# EAGLE board Rocket Panel v2.0 (EAGLE 5.06)
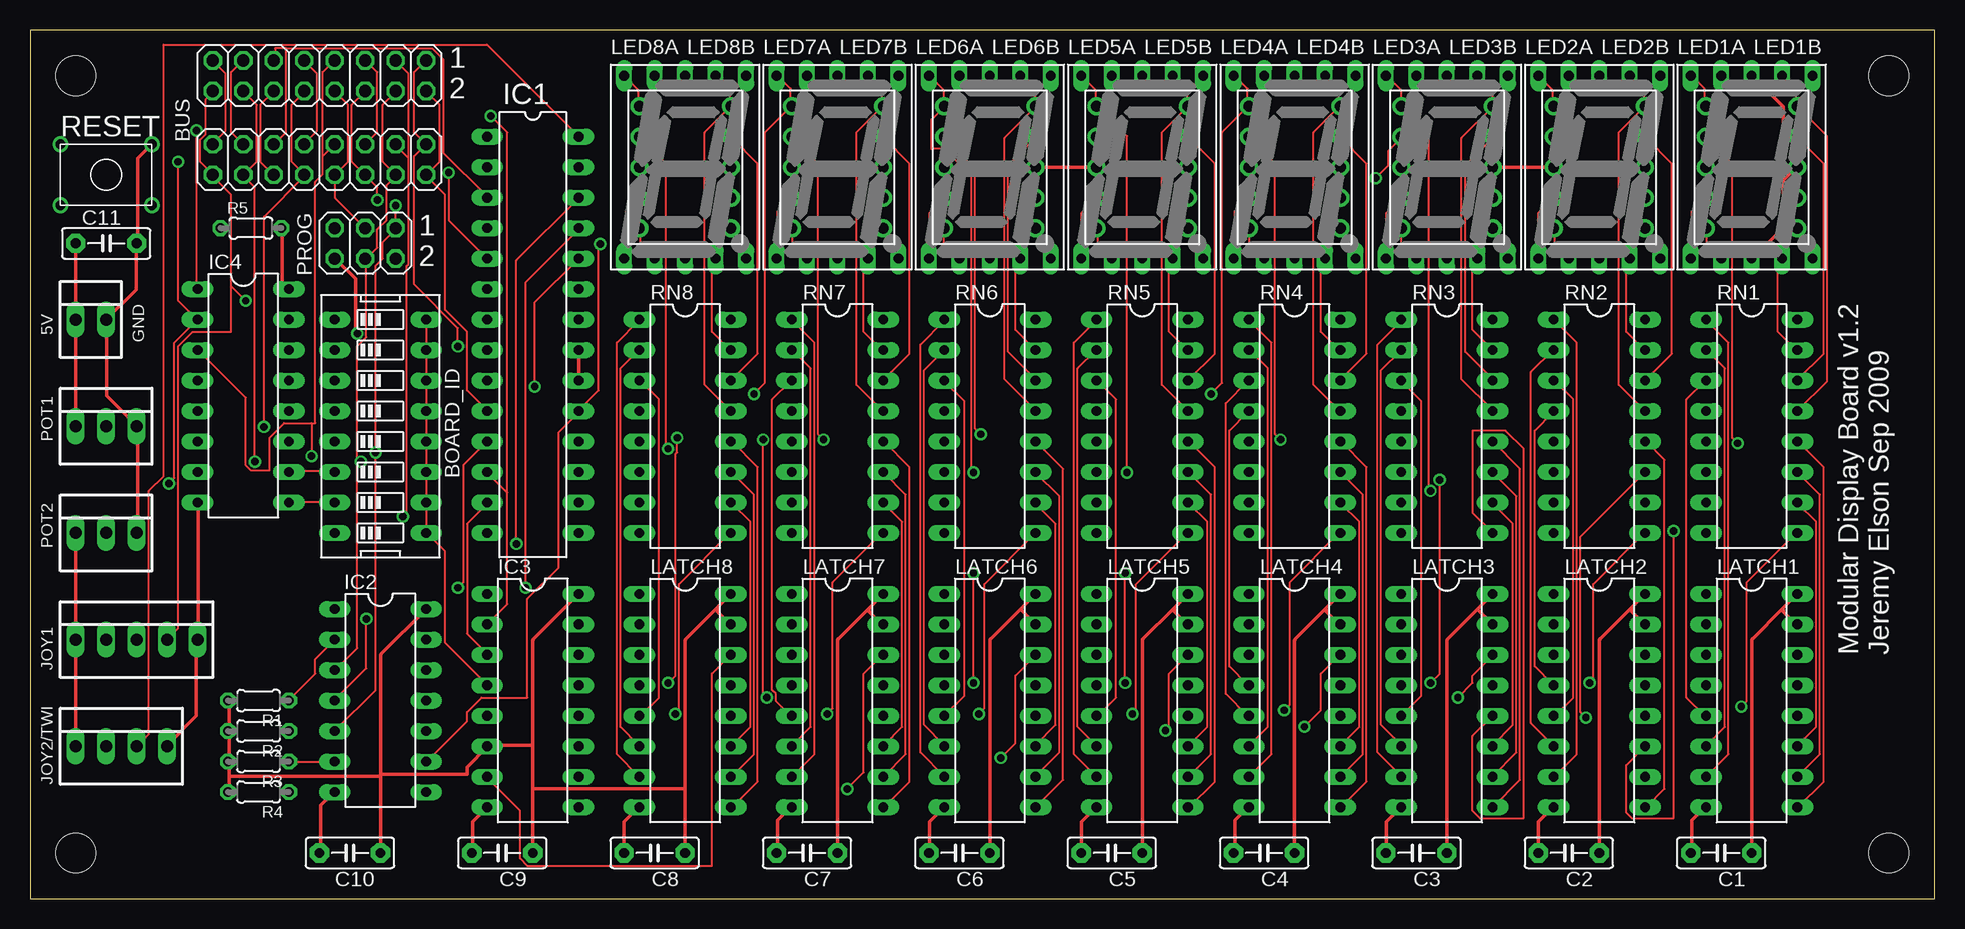
[diagram p0: board, top side]
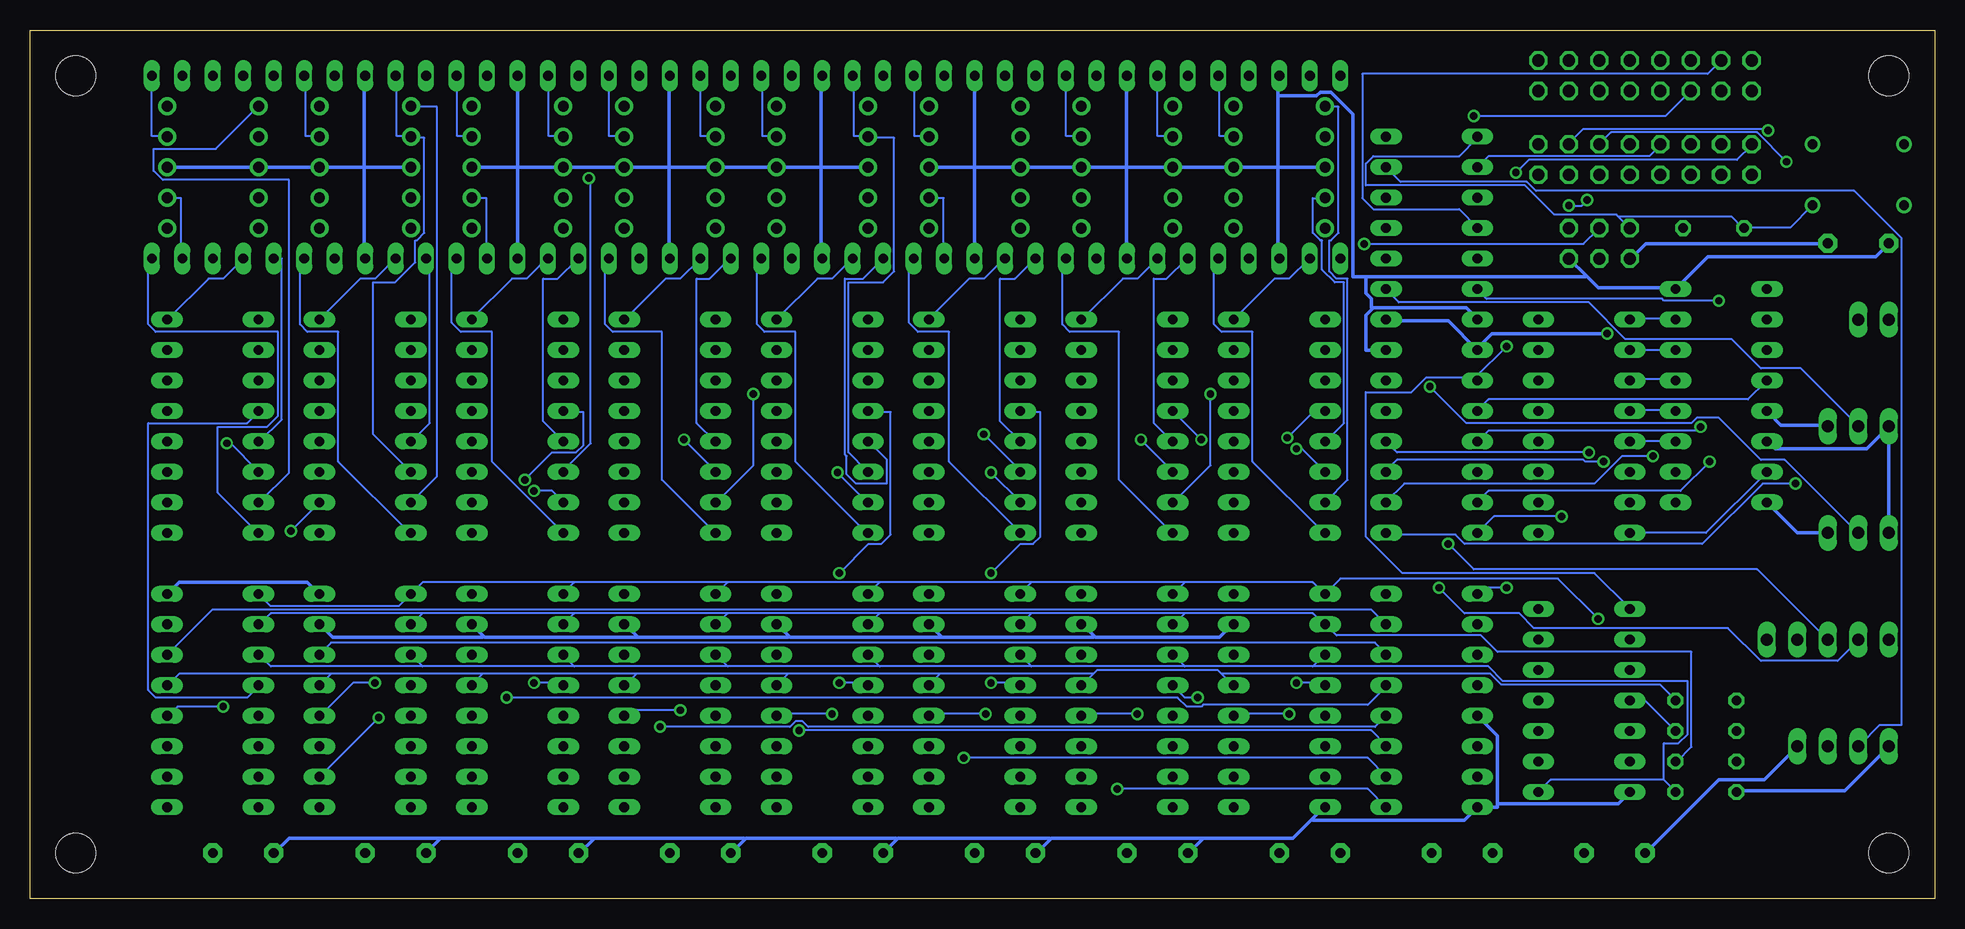
[diagram p1: board, bottom side, seen from below]

Size 158.75 x 72.39 mm. Coordinates in mm from the lower left corner, seen from the top.
Outline: 0,0 158.75,0 158.75,72.39 0,72.39 0,0
Copper layers (1*16): Top 0.035mm / dielectric 1.5mm / Bottom 0.035mm
Design rules "OurPCB *": minimum track width 6mil, minimum drill 24mil, track to track 6mil, track to pad 6mil, pad to pad 20mil, via to via 6mil, smd to smd 8mil, copper to edge 40mil, drill to drill 8mil, minimum pad ring 10mil, minimum via ring 8mil, stop-mask expansion 4mil, vias tented up to drill 0mil, thermal gap 10mil
Net classes: 0 default: width 0.152 mm, drill 0.152 mm, clearance 0.152 mm; 1 power: width 0.305 mm, drill 0.305 mm, clearance 0.152 mm to class 0, clearance 0.152 mm

## Footprints (pad centres in the part's own frame; a part is rotated, then mirrored left to right if it is on the bottom)
22-23-2021 = drill 1 long: 1 -1.27,0; 2 1.27,0
EDG-08 = drill 0.813 long: 1 -8.89,-3.81; 2 -6.35,-3.81; 3 -3.81,-3.81; 4 -1.27,-3.81; 5 1.27,-3.81; 6 3.81,-3.81; 7 6.35,-3.81; 8 8.89,-3.81; 9 8.89,3.81; 10 6.35,3.81; 11 3.81,3.81; 12 1.27,3.81; 13 -1.27,3.81; 14 -3.81,3.81; 15 -6.35,3.81; 16 -8.89,3.81
2X08 = drill 1.016 octagon: 1 -8.89,-1.27; 2 -8.89,1.27; 3 -6.35,-1.27; 4 -6.35,1.27; 5 -3.81,-1.27; 6 -3.81,1.27; 7 -1.27,-1.27; 8 -1.27,1.27; 9 1.27,-1.27; 10 1.27,1.27; 11 3.81,-1.27; 12 3.81,1.27; 13 6.35,-1.27; 14 6.35,1.27; 15 8.89,-1.27; 16 8.89,1.27
C5B2.5 = drill 0.813 pad 1.6 octagon: 1 -2.54,0; 2 2.54,0
DIL28-3 = drill 0.813 long: 1 -16.51,-3.81; 2 -13.97,-3.81; 3 -11.43,-3.81; 4 -8.89,-3.81; 5 -6.35,-3.81; 6 -3.81,-3.81; 7 -1.27,-3.81; 8 1.27,-3.81; 9 3.81,-3.81; 10 6.35,-3.81; 11 8.89,-3.81; 12 11.43,-3.81; 13 13.97,-3.81; 14 16.51,-3.81; 15 16.51,3.81; 16 13.97,3.81; 17 11.43,3.81; 18 8.89,3.81; 19 6.35,3.81; 20 3.81,3.81; 21 1.27,3.81; 22 -1.27,3.81; 23 -3.81,3.81; 24 -6.35,3.81; 25 -8.89,3.81; 26 -11.43,3.81; 27 -13.97,3.81; 28 -16.51,3.81
DIL14 = drill 0.813 long: 1 -7.62,-3.81; 2 -5.08,-3.81; 3 -2.54,-3.81; 4 0,-3.81; 5 2.54,-3.81; 6 5.08,-3.81; 7 7.62,-3.81; 8 7.62,3.81; 9 5.08,3.81; 10 2.54,3.81; 11 0,3.81; 12 -2.54,3.81; 13 -5.08,3.81; 14 -7.62,3.81
DIL16 = drill 0.813 long: 1 -8.89,-3.81; 2 -6.35,-3.81; 3 -3.81,-3.81; 4 -1.27,-3.81; 5 1.27,-3.81; 6 3.81,-3.81; 7 6.35,-3.81; 8 8.89,-3.81; 9 8.89,3.81; 10 6.35,3.81; 11 3.81,3.81; 12 1.27,3.81; 13 -1.27,3.81; 14 -3.81,3.81; 15 -6.35,3.81; 16 -8.89,3.81
22-23-2051 = drill 1 long: 1 -5.08,0; 2 -2.54,0; 3 0,0; 4 2.54,0; 5 5.08,0
22-23-2041 = drill 1 long: 1 -3.81,0; 2 -1.27,0; 3 1.27,0; 4 3.81,0
STAND-OFF = hole 3.302: 0,0
HDSP-M = drill 0.813 long: 1 -5.08,-7.62; 2 -2.54,-7.62; 3 0,-7.62; 4 2.54,-7.62; 5 5.08,-7.62; 6 5.08,7.62; 7 2.54,7.62; 8 0,7.62; 9 -2.54,7.62; 10 -5.08,7.62
LA-401 = drill 0.9 pad 1.5 round: 1 -3.81,5.08; 2 -3.81,2.54; 3 -3.81,0; 4 -3.81,-2.54; 5 -3.81,-5.08; 6 3.81,-5.08; 7 3.81,-2.54; 8 3.81,0; 9 3.81,2.54; 10 3.81,5.08
22-23-2031 = drill 1 long: 1 -2.54,0; 2 0,0; 3 2.54,0
2X03 = drill 1.016 octagon: 1 -2.54,-1.27; 2 -2.54,1.27; 3 0,-1.27; 4 0,1.27; 5 2.54,-1.27; 6 2.54,1.27
0204/5 = drill 0.813 octagon: 1 -2.54,0; 2 2.54,0
KSA_SWITCH_2X3MIL = drill 0.8 round: 1 -3.81,2.54; 2 3.81,2.54; 3 -3.81,-2.54; 4 3.81,-2.54

## Placement (x,y rotation side)
5V  [22-23-2021]  5.08,48.26 0 top
BOARD_ID  [EDG-08]  29.21,39.37 270 top
BUS  [2X08]  24.13,61.59 180 top
BUS1  [2X08]  24.13,68.58 180 top
C1  [C5B2.5]  140.97,3.81 180 top
C2  [C5B2.5]  128.27,3.81 180 top
C3  [C5B2.5]  115.57,3.81 180 top
C4  [C5B2.5]  102.87,3.81 180 top
C5  [C5B2.5]  90.17,3.81 180 top
C6  [C5B2.5]  77.47,3.81 180 top
C7  [C5B2.5]  64.77,3.81 180 top
C8  [C5B2.5]  52.07,3.81 180 top
C9  [C5B2.5]  39.37,3.81 180 top
C10  [C5B2.5]  26.67,3.81 180 top
C11  [C5B2.5]  6.35,54.61 0 top
IC1  MEGA8-P  [DIL28-3]  41.91,46.99 270 top
IC2  7407N  [DIL14]  29.21,16.51 270 top
IC3  74LS138N  [DIL16]  41.91,16.51 270 top
IC4  74LS138N  [DIL16]  17.78,41.91 270 top
JOY1  22-23-2051  [22-23-2051]  8.89,21.59 0 top
JOY2/TWI  22-23-2041  [22-23-2041]  7.62,12.7 0 top
JP3  STAND-OFF  [STAND-OFF]  154.94,68.58 0 top
JP4  STAND-OFF  [STAND-OFF]  3.81,3.81 180 top
JP5  STAND-OFF  [STAND-OFF]  3.81,68.58 90 top
JP6  STAND-OFF  [STAND-OFF]  154.94,3.81 90 top
LATCH1  74259N  [DIL16]  143.51,16.51 270 top
LATCH2  74259N  [DIL16]  130.81,16.51 270 top
LATCH3  74259N  [DIL16]  118.11,16.51 270 top
LATCH4  74259N  [DIL16]  105.41,16.51 270 top
LATCH5  74259N  [DIL16]  92.71,16.51 270 top
LATCH6  74259N  [DIL16]  80.01,16.51 270 top
LATCH7  74259N  [DIL16]  67.31,16.51 270 top
LATCH8  74259N  [DIL16]  54.61,16.51 270 top
LED1A  LITEON-7SEG-56  [HDSP-M]  143.51,60.96 0 top
LED1B  LITEON-7SEG-39  [LA-401]  143.51,60.96 0 top
LED2A  LITEON-7SEG-56  [HDSP-M]  130.81,60.96 0 top
LED2B  LITEON-7SEG-39  [LA-401]  130.81,60.96 0 top
LED3A  LITEON-7SEG-56  [HDSP-M]  118.11,60.96 0 top
LED3B  LITEON-7SEG-39  [LA-401]  118.11,60.96 0 top
LED4A  LITEON-7SEG-56  [HDSP-M]  105.41,60.96 0 top
LED4B  LITEON-7SEG-39  [LA-401]  105.41,60.96 0 top
LED5A  LITEON-7SEG-56  [HDSP-M]  92.71,60.96 0 top
LED5B  LITEON-7SEG-39  [LA-401]  92.71,60.96 0 top
LED6A  LITEON-7SEG-56  [HDSP-M]  80.01,60.96 0 top
LED6B  LITEON-7SEG-39  [LA-401]  80.01,60.96 0 top
LED7A  LITEON-7SEG-56  [HDSP-M]  67.31,60.96 0 top
LED7B  LITEON-7SEG-39  [LA-401]  67.31,60.96 0 top
LED8A  LITEON-7SEG-56  [HDSP-M]  54.61,60.96 0 top
LED8B  LITEON-7SEG-39  [LA-401]  54.61,60.96 0 top
POT1  [22-23-2031]  6.35,39.37 0 top
POT2  [22-23-2031]  6.35,30.48 0 top
PROG  [2X03]  27.94,54.61 180 top
R1  [0204/5]  19.05,16.51 180 top
R2  [0204/5]  19.05,13.97 180 top
R3  [0204/5]  19.05,11.43 180 top
R4  [0204/5]  19.05,8.89 180 top
R5  [0204/5]  18.41,55.88 0 top
RESET  KSA-SWITCH-SPST  [KSA_SWITCH_2X3MIL]  6.35,60.33 180 top
RN1  [DIL16]  143.51,39.37 270 top
RN2  [DIL16]  130.81,39.37 270 top
RN3  [DIL16]  118.11,39.37 270 top
RN4  [DIL16]  105.41,39.37 270 top
RN5  [DIL16]  92.71,39.37 270 top
RN6  [DIL16]  80.01,39.37 270 top
RN7  [DIL16]  67.31,39.37 270 top
RN8  [DIL16]  54.61,39.37 270 top

## Library data of the parts
5V JOY1 JOY2/TWI POT1 POT2 = con-molex
BOARD_ID = special
BUS BUS1 PROG = pinhead
C1-C11 = capacitor-wima
IC1 = atmel
IC2-IC4 LATCH1-LATCH8 = 74xx-us
JP3-JP6 RESET = SparkFun
LED1A LED1B LED2A LED2B LED3A LED3B LED4A LED4B LED5A LED5B LED6A LED6B LED7A LED7B LED8A LED8B = led-7-segment
R1-R5 = resistor
RN1-RN8 = resistor-dil

## Nets
/RESET: IC1.1 PROG.5 R5.1 RESET.1
BOARDSEL0: BUS1.3 BUS.3 IC1.14 IC4.1
BOARDSEL1: BUS1.5 BUS.5 IC1.15 IC4.2
BOARDSEL2: BUS1.7 BUS.7 IC1.16 IC4.3
DATA: BUS1.1 BUS.1 IC1.9 IC2.1
DIGSEL0: BUS1.10 BUS.10 IC1.11 IC3.1
DIGSEL1: BUS1.12 BUS.12 IC1.12 IC3.2
DIGSEL2: BUS1.14 BUS.14 IC1.13 IC3.3
GND [power]: 5V.2 C1.2 C2.2 C3.2 C4.2 C5.2 C6.2 C7.2 C8.2 C9.2 C10.2 C11.2 IC1.8 IC1.22 IC2.7 IC3.5 IC3.8 IC4.5 IC4.8 JOY1.5 JOY2/TWI.4 LATCH1.8 LATCH2.8 LATCH3.8 LATCH4.8 LATCH5.8 LATCH6.8 LATCH7.8 LATCH8.8 POT1.3 POT2.3 PROG.6 RESET.3
INPUT0: BUS1.9 BUS.9 IC1.2
INPUT1: BUS1.11 BUS.11 IC1.3
INPUT2: BUS1.13 BUS.13 IC1.4
INPUT3: BUS1.15 BUS.15 IC1.5
N$1: IC1.23 POT1.2
N$3: LED3A.5 LED3B.6 RN3.8
N$4: LATCH3.12 RN3.9
N$5: IC1.24 POT2.2
N$6: IC1.25 JOY1.2
N$7: IC3.7 LATCH8.14
N$8: LATCH3.9 RN3.12
N$9: LATCH3.10 RN3.11
N$10: LATCH3.11 RN3.10
N$11: LED3A.1 LED3B.4 RN3.5
N$12: BOARD_ID.1 IC4.15
N$13: BOARD_ID.2 IC4.14
N$14: BOARD_ID.3 IC4.13
N$15: BOARD_ID.4 IC4.12
N$16: BOARD_ID.5 IC4.11
N$17: BOARD_ID.6 IC4.10
N$18: BOARD_ID.7 IC4.9
N$19: BOARD_ID.8 IC4.7
N$20: LATCH2.4 RN2.4
N$21: IC3.15 LATCH1.14
N$22: IC3.14 LATCH2.14
N$23: IC1.26 JOY1.3
N$24: IC3.12 LATCH4.14
N$25: LATCH2.5 RN2.3
N$26: LATCH2.6 RN2.2
N$27: LATCH2.7 RN2.1
N$28: LED2A.7 LED2B.10 RN2.13
N$29: LATCH2.9 RN2.12
N$30: LATCH2.10 RN2.11
N$31: LATCH2.11 RN2.10
N$32: LED2A.6 LED2B.9 RN2.14
N$33: LED2A.4 LED2B.7 RN2.15
N$34: LED2A.2 LED2B.5 RN2.16
N$35: LED2A.1 LED2B.4 RN2.5
N$36: LED2A.9 LED2B.2 RN2.6
N$37: LED2A.10 LED2B.1 RN2.7
N$38: LED3A.9 LED3B.2 RN3.6
N$39: LED2A.5 LED2B.6 RN2.8
N$40: LATCH2.12 RN2.9
N$41: IC3.11 LATCH5.14
N$42: LED3A.10 LED3B.1 RN3.7
N$43: IC3.9 LATCH7.14
N$44: IC1.27 JOY2/TWI.2
N$45: BOARD_ID.9 BOARD_ID.10 BOARD_ID.11 BOARD_ID.12 BOARD_ID.13 BOARD_ID.14 BOARD_ID.15 BOARD_ID.16 IC3.4
N$46: LATCH3.4 RN3.4
N$47: LATCH3.5 RN3.3
N$48: LATCH3.6 RN3.2
N$49: LATCH3.7 RN3.1
N$50: LED3A.7 LED3B.10 RN3.13
N$51: LED3A.6 LED3B.9 RN3.14
N$52: LED3A.4 LED3B.7 RN3.15
N$53: LED3A.2 LED3B.5 RN3.16
N$54: LED4A.5 LED4B.6 RN4.8
N$55: LATCH4.12 RN4.9
N$56: IC1.28 JOY2/TWI.3
N$57: LATCH4.9 RN4.12
N$58: LATCH4.10 RN4.11
N$59: LATCH4.11 RN4.10
N$60: LED4A.1 LED4B.4 RN4.5
N$61: LED4A.9 LED4B.2 RN4.6
N$62: LED4A.10 LED4B.1 RN4.7
N$63: LATCH4.4 RN4.4
N$64: LATCH4.5 RN4.3
N$65: LATCH4.6 RN4.2
N$66: LATCH4.7 RN4.1
N$67: LED4A.7 LED4B.10 RN4.13
N$68: LED4A.6 LED4B.9 RN4.14
N$69: LED4A.4 LED4B.7 RN4.15
N$70: LED4A.2 LED4B.5 RN4.16
N$71: LED1A.5 LED1B.6 RN1.8
N$72: LATCH1.12 RN1.9
N$73: IC3.13 LATCH3.14
N$74: LATCH1.9 RN1.12
N$75: LATCH1.10 RN1.11
N$76: LATCH1.11 RN1.10
N$77: LED1A.1 LED1B.4 RN1.5
N$78: LED1A.9 LED1B.2 RN1.6
N$79: LED1A.10 LED1B.1 RN1.7
N$80: LATCH1.4 RN1.4
N$81: LATCH1.5 RN1.3
N$82: LATCH1.6 RN1.2
N$83: LATCH1.7 RN1.1
N$84: LED1A.7 LED1B.10 RN1.13
N$85: LED1A.6 LED1B.9 RN1.14
N$86: LED1A.4 LED1B.7 RN1.15
N$87: LED1A.2 LED1B.5 RN1.16
N$88: LED5A.5 LED5B.6 RN5.8
N$89: LATCH5.12 RN5.9
N$91: LATCH5.9 RN5.12
N$92: LATCH5.10 RN5.11
N$93: LATCH5.11 RN5.10
N$94: LED5A.1 LED5B.4 RN5.5
N$95: LED5A.9 LED5B.2 RN5.6
N$96: LED5A.10 LED5B.1 RN5.7
N$97: LATCH5.4 RN5.4
N$98: LATCH5.5 RN5.3
N$99: LATCH5.6 RN5.2
N$100: LATCH5.7 RN5.1
N$101: LED5A.7 LED5B.10 RN5.13
N$102: LED5A.6 LED5B.9 RN5.14
N$103: LED5A.4 LED5B.7 RN5.15
N$104: LED5A.2 LED5B.5 RN5.16
N$105: LED6A.5 LED6B.6 RN6.8
N$106: LATCH6.12 RN6.9
N$108: LATCH6.9 RN6.12
N$109: LATCH6.10 RN6.11
N$110: LATCH6.11 RN6.10
N$111: LED6A.1 LED6B.4 RN6.5
N$112: LED6A.9 LED6B.2 RN6.6
N$113: LED6A.10 LED6B.1 RN6.7
N$114: LATCH6.4 RN6.4
N$115: LATCH6.5 RN6.3
N$116: LATCH6.6 RN6.2
N$117: LATCH6.7 RN6.1
N$118: LED6A.7 LED6B.10 RN6.13
N$119: LED6A.6 LED6B.9 RN6.14
N$120: LED6A.4 LED6B.7 RN6.15
N$121: LED6A.2 LED6B.5 RN6.16
N$122: LED7A.5 LED7B.6 RN7.8
N$123: LATCH7.12 RN7.9
N$125: LATCH7.9 RN7.12
N$126: LATCH7.10 RN7.11
N$127: LATCH7.11 RN7.10
N$128: LED7A.1 LED7B.4 RN7.5
N$129: LED7A.9 LED7B.2 RN7.6
N$130: LED7A.10 LED7B.1 RN7.7
N$131: LATCH7.4 RN7.4
N$132: LATCH7.5 RN7.3
N$133: LATCH7.6 RN7.2
N$134: LATCH7.7 RN7.1
N$135: LED7A.7 LED7B.10 RN7.13
N$136: LED7A.6 LED7B.9 RN7.14
N$137: LED7A.4 LED7B.7 RN7.15
N$138: LED7A.2 LED7B.5 RN7.16
N$139: LED8A.5 LED8B.6 RN8.8
N$140: LATCH8.12 RN8.9
N$142: LATCH8.9 RN8.12
N$143: LATCH8.10 RN8.11
N$144: LATCH8.11 RN8.10
N$145: LED8A.1 LED8B.4 RN8.5
N$146: LED8A.9 LED8B.2 RN8.6
N$147: LED8A.10 LED8B.1 RN8.7
N$148: LATCH8.4 RN8.4
N$149: LATCH8.5 RN8.3
N$150: LATCH8.6 RN8.2
N$151: LATCH8.7 RN8.1
N$152: LED8A.7 LED8B.10 RN8.13
N$153: LED8A.6 LED8B.9 RN8.14
N$154: LED8A.4 LED8B.7 RN8.15
N$155: LED8A.2 LED8B.5 RN8.16
N$169: IC3.10 LATCH6.14
N_DATA: IC2.2 LATCH1.13 LATCH2.13 LATCH3.13 LATCH4.13 LATCH5.13 LATCH6.13 LATCH7.13 LATCH8.13 R1.1
N_SEGSEL0: IC2.4 LATCH1.1 LATCH2.1 LATCH3.1 LATCH4.1 LATCH5.1 LATCH6.1 LATCH7.1 LATCH8.1 R2.1
N_SEGSEL1: IC2.6 LATCH1.2 LATCH2.2 LATCH3.2 LATCH4.2 LATCH5.2 LATCH6.2 LATCH7.2 LATCH8.2 R3.1
N_SEGSEL2: IC2.8 LATCH1.3 LATCH2.3 LATCH3.3 LATCH4.3 LATCH5.3 LATCH6.3 LATCH7.3 LATCH8.3 R4.1
SEGSEL0: BUS1.4 BUS.4 IC1.17 IC2.3 PROG.4
SEGSEL1: BUS1.6 BUS.6 IC1.18 IC2.5 PROG.1
SEGSEL2: BUS1.8 BUS.8 IC1.19 IC2.9 PROG.3
SPARE: BUS1.16 BUS.16 IC1.6 JOY1.4
STROBE: BUS1.2 BUS.2 IC1.10 IC4.4
VCC [power]: 5V.1 C1.1 C2.1 C3.1 C4.1 C5.1 C6.1 C7.1 C8.1 C9.1 C10.1 C11.1 IC1.7 IC1.20 IC1.21 IC2.14 IC3.6 IC3.16 IC4.6 IC4.16 JOY1.1 JOY2/TWI.1 LATCH1.15 LATCH1.16 LATCH2.15 LATCH2.16 LATCH3.15 LATCH3.16 LATCH4.15 LATCH4.16 LATCH5.15 LATCH5.16 LATCH6.15 LATCH6.16 LATCH7.15 LATCH7.16 LATCH8.15 LATCH8.16 LED1A.3 LED1A.8 LED1B.3 LED1B.8 LED2A.3 LED2A.8 LED2B.3 LED2B.8 LED3A.3 LED3A.8 LED3B.3 LED3B.8 LED4A.3 LED4A.8 LED4B.3 LED4B.8 LED5A.3 LED5A.8 LED5B.3 LED5B.8 LED6A.3 LED6A.8 LED6B.3 LED6B.8 LED7A.3 LED7A.8 LED7B.3 LED7B.8 LED8A.3 LED8A.8 LED8B.3 LED8B.8 POT1.1 POT2.1 PROG.2 R1.2 R2.2 R3.2 R4.2 R5.2

## Tracks (layer width: path | path; a pad name or v marks a point on that pad's centre or on a via)
/RESET
  Bottom 0.152: RESET.1 10.21,57.76 12.04,55.93 15.85,55.93 R5.1 16,55.93 16.92,56.84 26.36,56.84 | 26.36,56.84 25.45,55.93 PROG.5 | 26.36,56.84 26.52,57 31.7,57 34.14,59.44 47.4,59.44 47.4,61.27 46.79,61.87 39.62,61.87 38.1,63.4 IC1.1
BOARDSEL0  (via drill 0.61)
  Top 0.152: v13.87,64.01 13.87,50.9 IC4.1 | v31.09,31.85 31.39,32.16 31.39,52.73 31.55,52.88 31.55,61.72 | 31.55,61.72 30.48,62.79 BUS.3 | 31.55,61.72 31.55,68.73 30.48,69.8 BUS1.3
  Bottom 0.152: v13.87,64.01 14.02,64.16 29.26,64.16 30.48,62.94 BUS.3 | IC1.14 36.73,31.85 v31.09,31.85
BOARDSEL1  (via drill 0.61)
  Top 0.152: v12.34,61.42 12.34,49.84 13.87,48.31 IC4.2 13.87,48.16 12.04,46.33 12.04,35.05 v11.58,34.59 | BUS1.5 28.04,69.8 28.96,68.89 28.96,63.86 28.04,62.94 BUS.5
  Bottom 0.152: v12.34,61.42 14.78,63.86 26.98,63.86 27.89,62.94 BUS.5 | IC1.15 45.57,30.33 39.93,30.33 39.17,29.57 19.36,29.57 14.33,34.59 v11.58,34.59
BOARDSEL2  (via drill 0.61)
  Top 0.152: 23.47,39.62 23.77,39.62 23.77,59.74 24.38,60.35 24.38,61.87 | 23.47,39.62 21.18,39.62 19.96,38.41 19.96,35.66 18.44,35.66 17.98,36.12 17.98,41.76 14.02,45.72 IC4.3 | 24.38,61.87 25.3,62.79 BUS.7 | 23.47,39.62 v23.47,36.88 | 24.38,61.87 24.38,68.89 25.3,69.8 BUS1.7
  Bottom 0.152: v23.47,36.88 26.06,36.88 28.35,34.59 44.2,34.59 45.72,33.07 IC1.16
DATA  (via drill 0.61)
  Top 0.152: BUS1.1 32.92,69.8 32,68.89 32,63.86 32.92,62.94 BUS.1 32.92,62.79 32,61.87 32,51.21 35.66,47.55 v35.66,46.02
  Bottom 0.152: 38.25,43.43 42.37,43.43 43.59,42.22 47.4,42.22 47.4,30.18 44.35,27.13 28.35,27.13 25.45,24.23 IC2.1 | 38.25,43.43 38.1,43.28 IC1.9 38.25,43.43 | 38.25,43.43 v35.66,46.02
DIGSEL0  (via drill 0.61)
  Top 0.152: BUS1.10 22.86,67.21 21.79,66.14 21.79,61.42 22.86,60.35 BUS.10 22.86,60.2 19.51,56.84 v19.51,39.32 | v35.66,25.91 36.12,26.36 36.12,36.12 IC1.11
  Bottom 0.152: v35.66,25.91 37.64,25.91 38.1,25.45 IC3.1 | v19.51,39.32 19.81,39.01 37.19,39.01 IC1.11
DIGSEL1  (via drill 0.61)
  Top 0.152: BUS.12 20.27,60.35 19.2,61.42 19.2,66.14 20.27,67.21 BUS1.12 | IC3.2 39.78,24.54 39.78,33.83 | 39.78,33.83 38.1,35.51 IC1.12 | v38.41,65.23 39.78,63.86 39.78,33.83
  Bottom 0.152: v38.41,65.23 22.4,65.23 20.42,67.21 BUS1.12
DIGSEL2  (via drill 0.61)
  Top 0.152: BUS1.14 17.83,67.21 18.9,66.14 18.9,61.42 17.83,60.35 BUS.14 17.83,60.2 18.75,59.28 v18.75,36.42 | IC3.3 38.1,20.42 36.42,22.1 36.42,31.24 38.1,32.92 IC1.13
  Bottom 0.152: v18.75,36.42 21.18,33.98 37.19,33.98 38.1,33.07 IC1.13
GND  (via drill 0.61)
  Top 0.305: JOY2/TWI.4 11.43,12.8 13.87,15.24 13.87,21.49 JOY1.5 14.02,21.64 14.02,32.92 IC4.8 | POT2.3 8.99,30.48 8.99,39.32 POT1.3 8.84,39.47 6.4,41.91 6.4,48.16 5V.2 6.4,48.31 8.84,50.75 8.84,54.56 C11.2 8.99,54.71 8.99,61.72 10.06,62.79 RESET.3 | v27.28,47.09 27.13,47.24 27.13,51.66 25.45,53.34 PROG.6 | IC2.7 25.3,8.84 24.23,7.77 24.23,3.81 C10.2 | IC3.8 36.88,6.4 36.88,3.81 C9.2 | LATCH1.8 139.6,7.62 138.53,6.55 138.53,3.81 C1.2 | C2.2 125.73,6.4 126.95,7.62 LATCH2.8 | LATCH3.8 113.08,6.4 113.08,3.81 C3.2 | LATCH4.8 101.5,7.62 100.43,6.55 100.43,3.81 C4.2 | C5.2 87.63,6.4 88.85,7.62 LATCH5.8 | LATCH6.8 74.98,6.4 74.98,3.81 C6.2 | C8.2 49.53,6.4 50.75,7.62 LATCH8.8 | LATCH7.8 63.4,7.62 62.33,6.55 62.33,3.81 C7.2
  Bottom 0.305: IC4.5 13.87,40.54 12.8,39.47 8.99,39.47 POT1.3 | IC4.8 13.87,32.92 11.43,30.48 8.99,30.48 POT2.3 | IC1.22 45.72,48.16 40.54,48.16 IC1.8 38.1,45.87 36.88,47.09 v27.28,47.09 | PROG.6 25.3,53.34 24.08,54.56 8.99,54.56 C11.2 | IC3.5 36.42,13.56 36.42,7.92 | 36.42,7.92 36.42,7.62 IC3.8 39.17,6.55 51.82,6.55 51.89,6.63 | 36.42,7.92 26.36,7.92 25.45,8.84 IC2.7 | 51.89,6.63 53.49,5.03 60.96,5.03 61.04,4.95 | 51.89,6.63 50.9,7.62 LATCH8.8 | 61.04,4.95 62.18,3.81 C7.2 | 73.69,4.95 73.61,5.03 61.11,5.03 61.04,4.95 | 73.69,4.95 74.83,3.81 C6.2 | 86.49,4.95 86.41,5.03 73.76,5.03 73.69,4.95 | 86.49,4.95 C5.2 | 99.14,4.95 99.06,5.03 86.56,5.03 86.49,4.95 | 99.14,4.95 100.28,3.81 C4.2 | 111.78,4.95 111.71,5.03 99.21,5.03 99.14,4.95 | 111.78,4.95 112.93,3.81 C3.2 | 124.59,4.95 124.51,5.03 111.86,5.03 111.78,4.95 | 124.59,4.95 C2.2 | C1.2 138.38,3.81 137.16,5.03 124.66,5.03 124.59,4.95 | JOY2/TWI.4 11.43,12.65 14.17,9.91 17.98,9.91 24.08,3.81 C10.2
INPUT0
  Top 0.152: BUS1.9 22.86,69.8 23.93,68.73 23.93,64.01 22.86,62.94 BUS.9
  Bottom 0.152: IC1.2 37.19,61.87 23.77,61.87 22.86,62.79 BUS.9
INPUT1
  Top 0.152: 21.34,70.87 20.42,70.87 20.42,69.95 BUS1.11 | 21.34,70.87 33.53,70.87 34.44,69.95 34.44,62.18 38.1,58.52 IC1.3 | 21.34,70.87 21.34,63.86 20.42,62.94 BUS.11
INPUT2
  Top 0.152: BUS.13 17.68,62.94 16.76,63.86 16.76,68.89 17.68,69.8 BUS1.13
  Bottom 0.152: IC1.4 38.1,55.93 39.62,57.45 46.79,57.45 47.7,58.37 47.7,68.73 18.9,68.73 17.83,69.8 BUS1.13
INPUT3  (via drill 0.61)
  Top 0.152: IC1.5 34.9,56.54 v34.9,60.5 | BUS1.15 15.24,69.8 16.31,68.73 16.31,64.01 15.24,62.94 BUS.15
  Bottom 0.152: v34.9,60.5 33.83,61.57 16.46,61.57 15.24,62.79 BUS.15
N$1
  Bottom 0.152: IC1.23 45.72,50.75 44.65,49.68 28.8,49.68 25.76,46.63 16.92,46.63 14.48,44.2 11.12,44.2 6.4,39.47 POT1.2
N$3
  Top 0.152: LED3B.6 121.92,55.78 123.14,54.56 123.14,53.34 LED3A.5
  Bottom 0.152: RN3.8 120.24,36.42 120.24,47.24 122.83,47.24 123.6,48.01 123.6,53.34 123.29,53.34 LED3A.5
N$4
  Top 0.152: LATCH3.12 120.24,13.56 120.24,7.32 120.85,6.71 124.51,6.71 124.51,37.49 122.99,39.01 120.24,39.01 120.24,32.16 RN3.9
N$5  (via drill 0.61)
  Top 0.152: IC1.24 42.06,49.68 v42.06,42.67
  Bottom 0.152: v42.06,42.67 39.01,39.62 20.27,39.62 19.81,40.08 17.98,40.08 14.48,36.58 12.5,36.58 6.4,30.48 POT2.2
N$6  (via drill 0.61)
  Top 0.152: v41.3,25.91 41.3,51.36 45.72,55.78 IC1.25
  Bottom 0.152: v41.3,25.91 39.17,23.77 34.59,23.77 33.38,22.55 17.22,22.55 14.48,19.81 8.08,19.81 6.4,21.49 JOY1.2
N$7
  Top 0.152: IC3.7 38.1,10.06 40.84,7.32 40.84,3.35 41.45,2.74 56.84,2.74 56.84,18.75 58.37,20.27 LATCH8.14
N$8
  Top 0.152: LATCH3.9 124.21,9.91 124.21,35.81 RN3.12
N$9
  Top 0.152: LATCH3.10 121.92,10.21 123.9,12.19 123.9,33.53 121.92,35.51 RN3.11
N$10
  Top 0.152: LATCH3.11 121.92,12.8 123.6,14.48 123.6,31.24 121.92,32.92 RN3.10
N$11
  Top 0.152: LED3B.4 114.3,58.37 113.08,57.15 113.08,53.34 LED3A.1
  Bottom 0.152: RN3.5 115.98,39.78 115.98,51.66 114.76,51.66 113.08,53.34 LED3A.1
N$12
  Bottom 0.152: IC4.15 21.64,48.31 25.3,48.31 BOARD_ID.1
N$13
  Bottom 0.152: IC4.14 21.64,45.72 25.3,45.72 BOARD_ID.2
N$14
  Bottom 0.152: IC4.13 21.64,43.28 25.3,43.28 BOARD_ID.3
N$15
  Bottom 0.152: IC4.12 21.64,40.69 25.3,40.69 BOARD_ID.4
N$16
  Bottom 0.152: IC4.11 21.64,38.1 25.3,38.1 BOARD_ID.5
N$17
  Top 0.152: IC4.10 21.64,35.66 25.3,35.66 BOARD_ID.6
N$18
  Top 0.152: IC4.9 21.64,33.07 25.3,33.07 BOARD_ID.7
N$19
  Bottom 0.152: IC4.7 14.02,35.51 19.05,30.48 25.3,30.48 BOARD_ID.8
N$20
  Top 0.152: LATCH2.4 126.95,17.83 125.42,19.36 125.42,39.01 126.95,40.54 RN2.4
N$21
  Bottom 0.152: IC3.15 46.94,24.08 143.56,24.08 147.22,20.42 LATCH1.14
N$22
  Bottom 0.152: IC3.14 45.72,20.42 46.63,21.34 133.66,21.34 134.57,20.42 LATCH2.14
N$23  (via drill 0.61)
  Top 0.152: v40.54,29.57 40.54,53.19 45.72,58.37 IC1.26
  Bottom 0.152: v40.54,29.57 38.41,27.43 14.78,27.43 8.99,21.64 JOY1.3
N$24  (via drill 0.61)
  Top 0.152: v106.22,14.33 107.59,15.7 107.59,18.75 109.12,20.27 LATCH4.14
  Bottom 0.152: IC3.12 46.63,14.33 93.88,14.33 94.34,14.78 94.94,14.78 95.4,14.33 v106.22,14.33
N$25
  Top 0.152: LATCH2.5 127.1,15.24 128.63,16.76 128.63,41.6 127.1,43.13 RN2.3
N$26
  Top 0.152: LATCH2.6 126.95,12.8 125.12,14.63 125.12,43.89 126.95,45.72 RN2.2
N$27
  Top 0.152: LATCH2.7 127.1,10.21 128.93,12.04 128.93,46.33 127.1,48.16 RN2.1
N$28
  Top 0.152: LED2A.7 134.57,67.36 134.57,66.14 LED2B.10 134.57,65.99 132.44,63.86 132.44,42.82 134.57,40.69 RN2.13
N$29
  Top 0.152: LATCH2.9 134.72,7.62 136.25,9.14 136.25,36.58 134.72,38.1 RN2.12
N$30  (via drill 0.61)
  Top 0.152: v129.69,15.09 129.24,15.54 129.24,30.18 134.57,35.51 RN2.11
  Bottom 0.152: v129.69,15.09 134.57,10.21 LATCH2.10
N$31  (via drill 0.61)
  Top 0.152: v137.01,30.63 137.01,6.71 133.5,6.71 133.04,7.16 133.04,11.12 134.57,12.65 LATCH2.11
  Bottom 0.152: v137.01,30.63 134.72,32.92 RN2.10
N$32
  Top 0.152: RN2.14 134.72,43.28 136.85,45.41 136.85,61.27 134.72,63.4 LED2B.9
  Bottom 0.152: LED2A.6 135.79,68.58 135.79,63.55 134.72,63.55 LED2B.9
N$33
  Top 0.152: LED2B.7 134.57,58.37 133.5,57.3 133.5,53.49 LED2A.4 133.04,53.03 133.04,47.24 134.57,45.72 RN2.15
N$34
  Top 0.152: LED2A.2 128.17,53.34 127.1,54.41 127.1,55.78 LED2B.5
  Bottom 0.152: RN2.16 134.57,48.31 131.22,51.66 130,51.66 128.32,53.34 LED2A.2
N$35
  Top 0.152: LED2A.1 125.73,57.15 126.95,58.37 LED2B.4
  Bottom 0.152: LED2A.1 125.42,53.34 125.42,39.62 126.95,38.1 RN2.5
N$36
  Bottom 0.152: LED2A.9 128.17,68.58 128.17,63.55 127.1,63.55 LED2B.2 126.95,63.4 125.88,63.4 125.88,55.47 126.49,54.86 126.64,54.86 126.64,53.03 128.32,51.36 130.15,51.36 130.15,38.71 127.1,35.66 RN2.6
N$37
  Top 0.152: LED2A.10 126.95,67.36 126.95,66.14 LED2B.1
  Bottom 0.152: RN2.7 126.95,33.07 124.82,35.2 124.82,65.99 126.95,65.99 LED2B.1
N$38  (via drill 0.61)
  Top 0.152: v112.17,60.05 113.23,61.11 113.23,62.33 114.3,63.4 LED3B.2
  Bottom 0.152: v112.17,60.05 112.01,60.05 112.01,37.95 114.3,35.66 RN3.6 | LED3A.9 115.52,68.58 115.52,63.55 114.3,63.55 LED3B.2
N$39
  Top 0.152: LED2B.6 134.72,55.78 135.79,54.71 135.79,53.34 LED2A.5
  Bottom 0.152: RN2.8 127.1,30.48 133.04,36.42 133.04,47.24 135.64,47.24 136.25,47.85 136.25,53.34 135.94,53.34 LED2A.5
N$40  (via drill 0.61)
  Top 0.152: v130,17.98 130.3,18.29 130.3,26.21 134.57,30.48 RN2.9
  Bottom 0.152: v130,17.98 131.83,17.98 134.57,15.24 LATCH2.12
N$41  (via drill 0.61)
  Top 0.152: v94.64,14.02 94.94,14.33 94.94,18.75 96.47,20.27 LATCH5.14
  Bottom 0.152: v94.64,14.02 46.94,14.02 45.72,12.8 IC3.11
N$42  (via drill 0.61)
  Top 0.152: LED3A.10 113.08,68.58 114.3,67.36 114.3,66.14 LED3B.1 114.3,65.99 116.59,63.7 116.59,34.14 v116.74,33.98
  Bottom 0.152: v116.74,33.98 115.21,33.98 114.3,33.07 RN3.7
N$43  (via drill 0.61)
  Top 0.152: v68.12,9.14 69.49,10.52 69.49,18.75 71.02,20.27 LATCH7.14
  Bottom 0.152: IC3.9 47.24,9.14 v68.12,9.14
N$44
  Bottom 0.152: IC1.27 44.5,59.74 33.98,59.74 33.22,58.98 6.71,58.98 2.74,55.02 2.74,14.48 4.57,14.48 6.25,12.8 JOY2/TWI.2
N$45
  Top 0.152: 33.07,45.72 33.07,48.16 BOARD_ID.16 | 33.07,45.72 BOARD_ID.15 33.07,45.72 | 33.07,38.1 33.07,35.66 BOARD_ID.11 33.07,35.51 33.07,33.07 BOARD_ID.10 33.07,32.92 33.07,30.48 | 33.07,38.1 BOARD_ID.12 33.07,38.1 | 33.07,30.48 BOARD_ID.9 33.07,30.48 | 33.07,30.48 34.59,28.96 34.59,21.34 38.1,17.83 IC3.4 | 33.07,38.1 33.07,40.54 BOARD_ID.13 33.07,40.69 33.07,43.13 BOARD_ID.14 33.07,43.28 33.07,45.72
N$46  (via drill 0.61)
  Top 0.152: v116.74,17.98 117.5,18.75 v117.5,34.9
  Bottom 0.152: v116.74,17.98 114.45,17.98 114.3,17.83 LATCH3.4 | v117.5,34.9 115.21,37.19 113.23,37.19 112.62,37.8 112.62,40.54 114.3,40.54 RN3.4
N$47
  Top 0.152: LATCH3.5 115.98,16.92 115.98,41.45 114.3,43.13 RN3.3
N$48
  Top 0.152: RN3.2 112.62,44.04 112.62,14.48 114.3,12.8 LATCH3.6
N$49
  Top 0.152: LATCH3.7 114.3,10.21 112.32,12.19 112.32,46.18 114.3,48.16 RN3.1
N$50
  Top 0.152: LED3A.7 120.7,68.58 121.92,67.36 121.92,66.14 LED3B.10 121.92,65.99 119.33,63.4 119.33,43.28 121.92,40.69 RN3.13
N$51
  Top 0.152: RN3.14 121.92,43.28 119.63,45.57 119.63,61.11 121.92,63.4 LED3B.9
  Bottom 0.152: LED3A.6 123.14,68.58 123.14,63.55 121.92,63.55 LED3B.9
N$52
  Top 0.152: RN3.15 120.24,47.4 120.24,53.03 120.55,53.34 LED3A.4
  Bottom 0.152: LED3A.4 120.7,53.34 120.7,58.37 121.92,58.37 LED3B.7
N$53
  Top 0.152: LED3A.2 115.52,53.34 114.3,54.56 114.3,55.78 LED3B.5
  Bottom 0.152: RN3.16 121.92,48.31 118.57,51.66 117.35,51.66 115.67,53.34 LED3A.2
N$54
  Top 0.152: LED4A.5 110.49,54.56 109.27,55.78 LED4B.6
  Bottom 0.152: LED4A.5 110.8,53.34 110.8,47.85 110.19,47.24 106.07,47.24 106.07,34.9 101.65,30.48 RN4.8
N$55  (via drill 0.61)
  Top 0.152: v104.55,15.7 105,16.15 105,26.36 109.12,30.48 RN4.9
  Bottom 0.152: v104.55,15.7 108.66,15.7 109.12,15.24 LATCH4.12
N$56
  Top 0.152: IC1.28 45.72,63.55 38.1,71.17 11.12,71.17 11.12,35.2 9.91,33.98 9.91,13.72 8.99,12.8 JOY2/TWI.3
N$57
  Top 0.152: LATCH4.9 109.27,7.62 111.4,9.75 111.4,35.97 109.27,38.1 RN4.12
N$58
  Top 0.152: LATCH4.10 109.27,10.21 111.1,12.04 111.1,33.68 109.27,35.51 RN4.11
N$59
  Top 0.152: LATCH4.11 109.27,12.8 110.8,14.33 110.8,31.39 109.27,32.92 RN4.10
N$60
  Top 0.152: LED4B.4 101.5,58.37 100.43,57.3 100.43,53.34 LED4A.1
  Bottom 0.152: RN4.5 101.65,38.1 103.17,39.62 103.17,51.66 102.11,51.66 100.43,53.34 LED4A.1
N$61  (via drill 0.61)
  Top 0.152: v104.24,38.25 103.78,38.71 103.78,61.27 101.65,63.4 LED4B.2
  Bottom 0.152: v104.24,38.25 101.65,35.66 RN4.6 | LED4A.9 102.87,63.55 101.65,63.55 LED4B.2
N$62  (via drill 0.61)
  Top 0.152: v98.45,42.06 99.36,42.98 99.36,63.86 101.5,65.99 LED4B.1 101.5,66.14 101.5,67.51 100.43,68.58 LED4A.10
  Bottom 0.152: RN4.7 101.5,33.07 98.45,36.12 v98.45,42.06
N$63
  Top 0.152: LATCH4.4 101.5,17.83 99.97,19.36 99.97,39.01 101.5,40.54 RN4.4
N$64
  Top 0.152: LATCH4.5 101.5,15.24 99.67,17.07 99.67,41.3 101.5,43.13 RN4.3
N$65
  Top 0.152: LATCH4.6 101.65,12.8 103.17,14.33 103.17,44.2 101.65,45.72 RN4.2
N$66
  Top 0.152: LATCH4.7 101.65,10.21 103.48,12.04 103.48,46.33 101.65,48.16 RN4.1
N$67
  Top 0.152: LED4A.7 108.05,68.58 109.12,67.51 109.12,66.14 LED4B.10 109.12,65.99 106.98,63.86 106.98,42.82 109.12,40.69 RN4.13
N$68
  Top 0.152: RN4.14 109.27,43.28 111.4,45.41 111.4,61.27 109.27,63.4 LED4B.9
  Bottom 0.152: LED4A.6 110.49,63.55 109.27,63.55 LED4B.9
N$69
  Top 0.152: LED4B.7 109.12,58.37 108.2,57.45 108.2,53.49 108.05,53.34 LED4A.4 107.9,53.34 107.59,53.03 107.59,47.24 109.12,45.72 RN4.15
N$70
  Top 0.152: LED4A.2 101.65,54.56 101.65,55.78 LED4B.5
  Bottom 0.152: LED4A.2 104.55,51.66 105.77,51.66 109.12,48.31 RN4.16
N$71
  Top 0.152: LED1A.5 148.59,54.56 147.37,55.78 LED1B.6
  Bottom 0.152: LED1A.5 148.9,53.34 148.9,47.85 148.28,47.24 138.07,47.24 138.07,40.23 138.99,39.32 143.1,39.32 143.1,33.83 139.75,30.48 RN1.8
N$72  (via drill 0.61)
  Top 0.152: v142.65,16 143.1,16.46 143.1,26.36 147.22,30.48 RN1.9
  Bottom 0.152: v142.65,16 146.46,16 147.22,15.24 LATCH1.12
N$73  (via drill 0.61)
  Top 0.152: v119.02,16.76 120.24,17.98 120.24,18.59 121.92,20.27 LATCH3.14
  Bottom 0.152: v119.02,16.76 63.09,16.76 62.33,16 61.11,16 60.96,16.15 47.24,16.15 45.72,17.68 IC3.13
N$74
  Top 0.152: LATCH1.9 147.37,7.62 149.5,9.75 149.5,35.97 147.37,38.1 RN1.12
N$75
  Top 0.152: LATCH1.10 147.37,10.21 149.2,12.04 149.2,33.68 147.37,35.51 RN1.11
N$76
  Top 0.152: LATCH1.11 147.37,12.8 148.9,14.33 148.9,31.39 147.37,32.92 RN1.10
N$77
  Top 0.152: LED1B.4 139.6,58.37 138.53,57.3 138.53,53.34 LED1A.1
  Bottom 0.152: RN1.5 139.6,38.1 137.77,39.93 137.77,53.34 138.38,53.34 LED1A.1
N$78  (via drill 0.61)
  Top 0.152: v142.34,37.95 141.88,38.41 141.88,61.27 140.82,62.33 | 140.82,62.33 139.75,63.4 LED1B.2 | LED1A.9 140.82,68.43 140.82,62.33
  Bottom 0.152: v142.34,37.95 142.04,37.95 139.75,35.66 RN1.6
N$79
  Top 0.152: LED1A.10 138.53,68.58 139.6,67.51 139.6,66.14 LED1B.1
  Bottom 0.152: RN1.7 139.6,33.07 137.16,35.51 137.16,59.89 147.68,59.89 148.44,60.66 148.44,62.48 143.26,62.48 139.75,65.99 LED1B.1
N$80
  Bottom 0.152: LATCH1.4 139.75,17.68 140.66,16.76 148.28,16.76 148.9,17.37 148.9,39.62 140.66,39.62 139.75,40.54 RN1.4
N$81
  Top 0.152: LATCH1.5 139.6,15.24 138.07,16.76 138.07,41.6 139.6,43.13 RN1.3
N$82
  Top 0.152: LATCH1.6 139.75,12.8 141.28,14.33 141.28,44.2 139.75,45.72 RN1.2
N$83
  Top 0.152: LATCH1.7 139.75,10.21 141.58,12.04 141.58,46.33 139.75,48.16 RN1.1
N$84
  Top 0.152: LED1A.7 146.15,68.58 147.22,67.51 147.22,66.14 LED1B.10 147.37,65.99 149.81,63.55 149.81,43.13 147.37,40.69 RN1.13
N$85
  Top 0.152: RN1.14 147.37,43.28 149.5,45.41 149.5,61.27 147.37,63.4 LED1B.9
  Bottom 0.152: LED1A.6 148.59,63.55 147.37,63.55 LED1B.9
N$86
  Top 0.152: RN1.15 147.22,45.72 145.69,47.24 145.69,53.03 146,53.34 LED1A.4
  Bottom 0.152: LED1A.4 146.15,53.34 146.15,58.37 147.22,58.37 LED1B.7
N$87
  Top 0.152: LED1A.2 139.75,54.56 139.75,55.78 LED1B.5
  Bottom 0.152: LED1A.2 142.65,51.66 143.87,51.66 147.22,48.31 RN1.16
N$88
  Top 0.152: LED5B.6 96.62,55.78 97.69,54.71 97.69,53.34 LED5A.5
  Bottom 0.152: RN5.8 89,30.48 94.94,36.42 94.94,47.24 97.54,47.24 98.15,47.85 98.15,53.34 97.84,53.34 LED5A.5
N$89  (via drill 0.61)
  Top 0.152: v91.9,15.39 92.2,15.7 92.2,26.21 96.47,30.48 RN5.9
  Bottom 0.152: v91.9,15.39 96.32,15.39 96.47,15.24 LATCH5.12
N$91
  Top 0.152: LATCH5.9 96.62,7.62 98.75,9.75 98.75,35.97 96.62,38.1 RN5.12
N$92
  Top 0.152: LATCH5.10 96.62,10.21 98.45,12.04 98.45,33.68 96.62,35.51 RN5.11
N$93
  Top 0.152: LATCH5.11 96.62,12.8 98.15,14.33 98.15,31.39 96.62,32.92 RN5.10
N$94
  Top 0.152: LED5A.1 87.63,57.15 88.85,58.37 LED5B.4
  Bottom 0.152: LED5A.1 89.31,51.66 90.83,51.66 90.83,37.03 90.68,36.88 90.68,35.36 89.92,34.59 87.33,34.59 87.33,36.58 88.85,38.1 RN5.5
N$95
  Bottom 0.152: RN5.6 89,35.66 90.53,37.19 90.53,51.36 87.63,51.36 86.72,52.27 86.72,63.4 88.85,63.4 LED5B.2 89,63.55 90.07,63.55 90.07,68.58 LED5A.9
N$96  (via drill 0.61)
  Top 0.152: v91.44,35.51 91.44,63.55 89,65.99 LED5B.1 88.85,66.14 88.85,67.36 LED5A.10
  Bottom 0.152: v91.44,35.51 89,33.07 RN5.7
N$97  (via drill 0.61)
  Top 0.152: v91.29,17.98 v91.29,27.13
  Bottom 0.152: v91.29,17.98 89.15,17.98 89,17.83 LATCH5.4 | v91.29,27.13 88.85,29.57 87.78,29.57 87.02,30.33 87.02,40.54 88.85,40.54 RN5.4
N$98
  Top 0.152: LATCH5.5 89,15.24 90.53,16.76 90.53,41.6 89,43.13 RN5.3
N$99
  Top 0.152: LATCH5.6 88.85,12.8 87.33,14.33 87.33,44.2 88.85,45.72 RN5.2
N$100
  Top 0.152: LATCH5.7 88.85,10.21 87.02,12.04 87.02,46.33 88.85,48.16 RN5.1
N$101
  Top 0.152: LED5A.7 96.47,67.36 96.47,66.14 LED5B.10 96.47,65.99 94.34,63.86 94.34,42.82 96.47,40.69 RN5.13
N$102
  Top 0.152: RN5.14 96.62,43.28 98.75,45.41 98.75,61.27 96.62,63.4 LED5B.9
  Bottom 0.152: LED5A.6 97.69,68.58 97.69,63.55 96.62,63.55 LED5B.9
N$103
  Top 0.152: LED5B.7 96.47,58.37 95.4,57.3 95.4,53.49 LED5A.4 94.94,53.03 94.94,47.24 96.47,45.72 RN5.15
N$104
  Top 0.152: LED5A.2 90.07,53.34 89,54.41 89,55.78 LED5B.5
  Bottom 0.152: RN5.16 96.47,48.31 93.12,51.66 91.9,51.66 90.22,53.34 LED5A.2
N$105
  Top 0.152: LED6B.6 83.82,55.78 85.04,54.56 85.04,53.34 LED6A.5
  Bottom 0.152: RN6.8 82.14,36.42 82.14,47.24 84.73,47.24 85.5,48.01 85.5,53.34 85.19,53.34 LED6A.5
N$106  (via drill 0.61)
  Top 0.152: v79.1,15.39 79.55,15.85 79.55,26.21 RN6.9
  Bottom 0.152: LATCH6.12 83.67,15.39 v79.1,15.39
N$108
  Top 0.152: LATCH6.9 86.11,9.91 86.11,35.81 RN6.12
N$109
  Top 0.152: LATCH6.10 83.82,10.21 85.8,12.19 85.8,33.53 83.82,35.51 RN6.11
N$110
  Top 0.152: LATCH6.11 83.82,12.8 85.5,14.48 85.5,31.24 83.82,32.92 RN6.10
N$111
  Top 0.152: LED6B.4 76.2,58.37 74.98,57.15 74.98,53.34 LED6A.1
  Bottom 0.152: RN6.5 77.88,39.78 77.88,51.66 76.66,51.66 74.98,53.34 LED6A.1
N$112  (via drill 0.61)
  Top 0.152: v79.25,38.71 78.79,39.17 78.79,60.81 77.27,62.33 | 77.27,62.33 76.2,63.4 LED6B.2 | 77.27,62.33 77.27,68.43 77.42,68.58 LED6A.9
  Bottom 0.152: v79.25,38.71 76.2,35.66 RN6.6
N$113  (via drill 0.61)
  Top 0.152: v78.64,35.51 78.49,35.66 78.49,60.2 76.2,62.48 75.13,62.48 75.13,64.92 76.2,65.99 LED6B.1 76.2,66.14 76.2,67.36 74.98,68.58 LED6A.10
  Bottom 0.152: v78.64,35.51 76.2,33.07 RN6.7
N$114  (via drill 0.61)
  Top 0.152: v78.64,17.98 v78.64,27.13
  Bottom 0.152: v78.64,17.98 76.35,17.98 76.2,17.83 LATCH6.4 | v78.64,27.13 76.2,29.57 75.13,29.57 74.52,30.18 74.52,40.54 76.2,40.54 RN6.4
N$115
  Top 0.152: LATCH6.5 77.88,16.92 77.88,41.45 76.2,43.13 RN6.3
N$116
  Top 0.152: RN6.2 74.52,44.04 74.52,14.48 76.2,12.8 LATCH6.6
N$117
  Top 0.152: LATCH6.7 76.2,10.21 74.22,12.19 74.22,46.18 76.2,48.16 RN6.1
N$118
  Top 0.152: LED6A.7 82.6,68.58 83.82,67.36 83.82,66.14 LED6B.10 83.82,65.99 81.23,63.4 81.23,43.28 83.82,40.69 RN6.13
N$119
  Top 0.152: RN6.14 83.82,43.28 81.53,45.57 81.53,61.11 83.82,63.4 LED6B.9
  Bottom 0.152: LED6A.6 85.04,68.58 85.04,63.55 83.82,63.55 LED6B.9
N$120
  Top 0.152: RN6.15 82.14,47.4 82.14,53.03 82.45,53.34 LED6A.4
  Bottom 0.152: LED6A.4 82.6,53.34 82.6,58.37 83.82,58.37 LED6B.7
N$121
  Top 0.152: LED6A.2 77.42,53.34 76.2,54.56 76.2,55.78 LED6B.5
  Bottom 0.152: RN6.16 83.82,48.31 80.47,51.66 79.25,51.66 77.57,53.34 LED6A.2
N$122
  Top 0.152: LED7A.5 72.39,54.56 71.17,55.78 LED7B.6
  Bottom 0.152: LED7A.5 72.69,53.34 72.69,47.85 72.08,47.24 67.97,47.24 67.97,34.9 63.55,30.48 RN7.8
N$123  (via drill 0.61)
  Top 0.152: v66.45,15.39 66.9,15.85 66.9,26.36 71.02,30.48 RN7.9
  Bottom 0.152: v66.45,15.39 70.87,15.39 71.02,15.24 LATCH7.12
N$125
  Top 0.152: LATCH7.9 71.17,7.62 73.3,9.75 73.3,35.97 71.17,38.1 RN7.12
N$126
  Top 0.152: LATCH7.10 71.17,10.21 73,12.04 73,33.68 71.17,35.51 RN7.11
N$127
  Top 0.152: LATCH7.11 71.17,12.8 72.69,14.33 72.69,31.39 71.17,32.92 RN7.10
N$128
  Top 0.152: LED7B.4 63.4,58.37 62.33,57.3 62.33,53.34 LED7A.1
  Bottom 0.152: RN7.5 63.55,38.1 65.08,39.62 65.08,51.66 64.01,51.66 62.33,53.34 LED7A.1
N$129  (via drill 0.61)
  Top 0.152: v66.14,38.25 65.68,38.71 65.68,61.27 63.55,63.4 LED7B.2
  Bottom 0.152: v66.14,38.25 63.55,35.66 RN7.6 | LED7A.9 64.77,63.55 63.55,63.55 LED7B.2
N$130  (via drill 0.61)
  Top 0.152: v60.35,42.06 61.27,42.98 61.27,63.86 63.4,65.99 LED7B.1 63.4,66.14 63.4,67.51 62.33,68.58 LED7A.10
  Bottom 0.152: v60.35,42.06 60.35,36.12 63.4,33.07 RN7.7
N$131  (via drill 0.61)
  Top 0.152: v61.42,16.76 61.11,17.07 v61.11,38.25
  Bottom 0.152: v61.42,16.76 62.48,16.76 63.4,17.68 LATCH7.4 | v61.11,38.25 63.4,40.54 RN7.4
N$132
  Top 0.152: LATCH7.5 63.4,15.24 62.18,16.46 62.18,17.07 61.87,17.37 61.87,41.6 63.4,43.13 RN7.3
N$133
  Top 0.152: LATCH7.6 63.55,12.8 65.08,14.33 65.08,44.2 63.55,45.72 RN7.2
N$134
  Top 0.152: LATCH7.7 63.55,10.21 65.38,12.04 65.38,46.33 63.55,48.16 RN7.1
N$135
  Top 0.152: LED7A.7 69.95,68.58 71.02,67.51 71.02,66.14 LED7B.10 71.02,65.99 68.89,63.86 68.89,42.82 71.02,40.69 RN7.13
N$136
  Top 0.152: RN7.14 71.17,43.28 73.3,45.41 73.3,61.27 71.17,63.4 LED7B.9
  Bottom 0.152: LED7A.6 72.39,63.55 71.17,63.55 LED7B.9
N$137
  Top 0.152: LED7B.7 71.02,58.37 70.1,57.45 70.1,53.49 69.95,53.34 LED7A.4 69.8,53.34 69.49,53.03 69.49,47.24 71.02,45.72 RN7.15
N$138
  Top 0.152: LED7A.2 63.55,54.56 63.55,55.78 LED7B.5
  Bottom 0.152: LED7A.2 66.45,51.66 67.67,51.66 71.02,48.31 RN7.16
N$139
  Top 0.152: LED8B.6 58.52,55.78 59.59,54.71 59.59,53.34 LED8A.5
  Bottom 0.152: RN8.8 50.9,30.48 56.84,36.42 56.84,47.24 59.44,47.24 60.05,47.85 60.05,53.34 59.74,53.34 LED8A.5
N$140  (via drill 0.61)
  Top 0.152: v53.8,15.39 54.1,15.7 54.1,26.21 58.37,30.48 RN8.9
  Bottom 0.152: v53.8,15.39 58.22,15.39 58.37,15.24 LATCH8.12
N$142
  Top 0.152: LATCH8.9 58.52,7.62 60.66,9.75 60.66,35.97 58.52,38.1 RN8.12
N$143
  Top 0.152: LATCH8.10 58.52,10.21 60.35,12.04 60.35,33.68 58.52,35.51 RN8.11
N$144
  Top 0.152: LATCH8.11 58.52,12.8 60.05,14.33 60.05,31.39 58.52,32.92 RN8.10
N$145
  Top 0.152: LED8A.1 49.68,53.49 49.68,57.3 50.75,58.37 LED8B.4
  Bottom 0.152: RN8.5 50.75,38.1 49.23,39.62 49.23,51.36 49.99,51.36 51.05,52.43 51.05,54.86 51.21,54.86 51.82,55.47 51.82,58.37 50.9,58.37 LED8B.4
N$146  (via drill 0.61)
  Top 0.152: v53.19,37.49 53.03,37.64 53.03,61.27 51.82,62.48 | 51.82,62.48 50.9,63.4 LED8B.2 | 51.82,62.48 51.82,68.43 51.97,68.58 LED8A.9
  Bottom 0.152: v53.19,37.49 52.73,37.49 50.9,35.66 RN8.6
N$147
  Top 0.152: LED8A.10 50.75,67.36 50.75,66.14 LED8B.1
  Bottom 0.152: RN8.7 50.75,33.07 48.92,34.9 48.92,51.66 49.84,51.66 50.44,52.27 50.44,54.86 50.29,54.86 49.68,55.47 49.68,65.99 50.75,65.99 LED8B.1
N$148  (via drill 0.61)
  Top 0.152: v53.19,17.98 53.8,18.59 53.8,37.03 53.95,37.19 v53.95,38.41
  Bottom 0.152: v53.19,17.98 51.05,17.98 50.9,17.83 LATCH8.4 | v53.95,38.41 51.82,40.54 50.9,40.54 RN8.4
N$149
  Top 0.152: LATCH8.5 50.9,15.24 52.43,16.76 52.43,41.6 50.9,43.13 RN8.3
N$150
  Top 0.152: LATCH8.6 50.75,12.8 49.23,14.33 49.23,44.2 50.75,45.72 RN8.2
N$151
  Top 0.152: LATCH8.7 50.75,10.21 48.92,12.04 48.92,46.33 50.75,48.16 RN8.1
N$152
  Top 0.152: LED8A.7 58.37,67.36 58.37,66.14 LED8B.10 58.37,65.99 56.24,63.86 56.24,42.82 58.37,40.69 RN8.13
N$153
  Top 0.152: RN8.14 58.52,43.28 60.66,45.41 60.66,61.27 58.52,63.4 LED8B.9
  Bottom 0.152: LED8A.6 59.59,68.58 59.59,63.55 58.52,63.55 LED8B.9
N$154
  Top 0.152: LED8B.7 58.37,58.37 57.3,57.3 57.3,53.49 LED8A.4 56.84,53.03 56.84,47.24 58.37,45.72 RN8.15
N$155
  Top 0.152: LED8A.2 51.97,53.34 50.9,54.41 50.9,55.78 LED8B.5
  Bottom 0.152: RN8.16 58.37,48.31 55.02,51.66 53.8,51.66 52.12,53.34 LED8A.2
N$169  (via drill 0.61)
  Top 0.152: v80.92,11.73 82.14,12.95 82.14,18.59 83.82,20.27 LATCH6.14
  Bottom 0.152: v80.92,11.73 47.24,11.73 45.72,10.21 IC3.10
N_DATA
  Top 0.152: R1.1 21.64,16.61 23.77,18.75 23.77,19.96 25.3,21.49 IC2.2
  Bottom 0.152: 59.44,18.75 59.74,19.05 69.8,19.05 70.1,18.75 | 59.44,18.75 58.52,17.83 LATCH8.13 | 70.1,18.75 71.02,17.83 LATCH7.13 | 82.91,18.75 83.82,17.83 LATCH6.13 | 70.1,18.75 82.91,18.75 | 95.56,18.75 96.47,17.83 LATCH5.13 | 82.91,18.75 95.56,18.75 | 108.2,18.75 109.12,17.83 LATCH4.13 | 95.56,18.75 108.2,18.75 | 121.01,18.75 121.92,17.83 LATCH3.13 | 108.2,18.75 121.01,18.75 | 133.66,18.75 134.57,17.83 LATCH2.13 | 121.01,18.75 133.66,18.75 | 133.66,18.75 146.3,18.75 147.22,17.83 LATCH1.13 | 59.44,18.75 37.03,18.75 36.12,17.83 22.86,17.83 21.64,16.61 R1.1
N_SEGSEL0  (via drill 0.61)
  Top 0.152: v28.04,23.32 28.04,19.2 25.45,16.61 IC2.4
  Bottom 0.152: R2.1 21.64,14.02 24.08,16.46 25.3,16.46 IC2.4 | 62.48,26.36 51.82,26.36 50.9,25.45 LATCH8.1 50.75,25.45 49.53,26.67 31.39,26.67 v28.04,23.32 | 62.48,26.36 63.4,25.45 LATCH7.1 | 75.29,26.36 76.2,25.45 LATCH6.1 | 62.48,26.36 75.29,26.36 | 87.94,26.36 88.85,25.45 LATCH5.1 | 75.29,26.36 87.94,26.36 | 100.58,26.36 101.5,25.45 LATCH4.1 | 87.94,26.36 100.58,26.36 | 113.39,26.36 114.3,25.45 LATCH3.1 | 100.58,26.36 113.39,26.36 | 113.39,26.36 126.03,26.36 126.95,25.45 LATCH2.1 127.1,25.3 128.02,24.38 138.68,24.38 139.6,25.3 LATCH1.1
N_SEGSEL1
  Top 0.152: R3.1 21.64,11.43 25.3,11.43 IC2.6
  Bottom 0.152: 62.48,23.77 51.82,23.77 50.9,22.86 LATCH8.2 50.75,22.86 49.84,21.95 37.8,21.95 36.42,20.57 20.27,20.57 20.27,12.65 21.49,11.43 R3.1 | 62.48,23.77 63.4,22.86 LATCH7.2 | 75.29,23.77 LATCH6.2 | 62.48,23.77 75.29,23.77 | 87.94,23.77 88.85,22.86 LATCH5.2 | 75.29,23.77 87.94,23.77 | 100.58,23.77 101.5,22.86 LATCH4.2 | 87.94,23.77 100.58,23.77 | 113.39,23.77 LATCH3.2 | 100.58,23.77 113.39,23.77 | 126.03,23.77 126.95,22.86 LATCH2.2 | 113.39,23.77 126.03,23.77 | 126.03,23.77 138.68,23.77 139.6,22.86 LATCH1.2
N_SEGSEL2
  Bottom 0.152: 22.55,9.91 21.64,8.99 R4.1 | 22.55,9.91 32,9.91 32.92,8.99 IC2.8 | 51.82,19.36 50.9,20.27 LATCH8.3 | 51.82,19.36 62.48,19.36 | 62.48,19.36 63.4,20.27 LATCH7.3 | 75.29,19.36 76.2,20.27 LATCH6.3 | 62.48,19.36 75.29,19.36 | 87.94,19.36 88.85,20.27 LATCH5.3 | 75.29,19.36 87.94,19.36 | 100.58,19.36 101.5,20.27 LATCH4.3 | 87.94,19.36 100.58,19.36 | 113.39,19.36 114.3,20.27 LATCH3.3 | 100.58,19.36 113.39,19.36 | 126.03,19.36 126.95,20.27 LATCH2.3 | 113.39,19.36 126.03,19.36 | 126.03,19.36 138.68,19.36 139.6,20.27 LATCH1.3 | 22.55,9.91 22.55,12.95 21.34,12.95 20.57,13.72 20.57,18.14 35.97,18.14 37.19,19.36 51.82,19.36
SEGSEL0  (via drill 0.61)
  Top 0.152: BUS1.4 30.48,67.21 29.41,66.14 29.41,61.42 30.48,60.35 BUS.4 30.48,60.2 29.72,59.44 29.72,56.54 28.96,55.78 28.96,54.25 28.04,53.34 | 27.28,36.42 27.28,46.02 28.04,46.79 28.04,53.34 | 27.28,36.42 27.28,20.88 25.45,19.05 IC2.3 | 28.04,53.34 PROG.4 28.04,53.34 | 27.28,36.42 v27.58,36.42
  Bottom 0.152: v27.58,36.42 29.11,36.42 29.26,36.58 44.81,36.58 45.72,35.66 IC1.17
SEGSEL1  (via drill 0.61)
  Top 0.152: BUS1.6 27.89,67.21 26.82,66.14 26.82,61.42 27.89,60.35 BUS.6 28.04,60.2 28.96,59.28 v28.96,58.22 | IC2.5 25.45,14.02 28.8,17.37 v28.8,37.19 28.8,52.73 29.41,53.34 29.41,54.71 30.48,55.78 PROG.1 30.48,55.93 v30.48,57.76
  Bottom 0.152: IC1.18 44.81,37.19 v28.8,37.19 | v28.96,58.22 29.41,57.76 v30.48,57.76
SEGSEL2  (via drill 0.61)
  Top 0.152: PROG.3 27.89,55.93 25.45,58.37 25.45,60.2 BUS.8 25.45,60.35 26.52,61.42 26.52,66.14 25.45,67.21 BUS1.8 | IC2.9 33.07,11.43 36.42,14.78 36.42,15.54 37.64,16.76 41.45,16.76 41.45,24.99 44.04,27.58 44.04,38.86 45.72,40.54 IC1.19 45.72,40.69 47.4,42.37 47.4,54.41 v47.55,54.56
  Bottom 0.152: v47.55,54.56 29.26,54.56 28.04,55.78 PROG.3
SPARE  (via drill 0.61)
  Top 0.152: 16.76,51.05 v17.98,49.84 | 16.76,51.05 16.76,58.67 15.24,60.2 BUS.16 15.24,60.35 14.17,61.42 14.17,63.25 14.63,63.7 14.63,66.6 15.24,67.21 BUS1.16 | 16.76,51.05 16.76,47.24 13.56,47.24 12.34,46.02 12.34,22.55 11.43,21.64 JOY1.4
  Bottom 0.152: v17.98,49.84 22.55,49.84 22.71,49.99 37.34,49.99 38.1,50.75 IC1.6
STROBE
  Top 0.152: BUS1.2 33.07,67.21 34.14,66.14 34.14,61.42 33.07,60.35 BUS.2 33.07,60.2 34.59,58.67 34.59,49.07 36.42,47.24 36.42,42.37 38.1,40.69 IC1.10
  Bottom 0.152: IC4.4 14.02,43.13 15.54,41.6 37.19,41.6 38.1,40.69 IC1.10
VCC
  Top 0.305: C1.1 143.51,21.48 arc-45 143.58,21.66 146.07,24.16 | LATCH1.16 146.07,24.16 | C2.1 130.81,21.48 arc-45 130.88,21.66 133.4,24.18 | 133.4,24.18 LATCH2.16 | C3.1 118.11,21.48 arc-45 118.18,21.66 120.65,24.13 | 120.65,24.13 LATCH3.16 | C4.1 105.41,21.48 arc-45 105.48,21.66 107.97,24.16 | 107.97,24.16 LATCH4.16 | C5.1 92.71,21.48 arc-45 92.78,21.66 95.3,24.18 | 95.3,24.18 LATCH5.16 | C6.1 80.01,21.48 arc-45 80.08,21.66 82.55,24.13 | 82.55,24.13 LATCH6.16 | C7.1 67.31,21.48 arc-45 67.38,21.66 69.88,24.16 | 69.88,24.16 LATCH7.16 | 54.61,9.14 C8.1 | 54.61,9.14 54.61,21.48 arc-45 54.68,21.66 57.2,24.18 | 57.2,24.18 LATCH8.16 | 41.91,9.14 C9.1 | 41.91,12.8 41.91,9.14 | 41.91,12.8 41.91,21.48 arc-45 41.98,21.66 IC3.16 | 29.21,10.21 C10.1 | 29.21,10.21 29.21,10.36 | 29.21,10.36 29.21,20.21 arc-45 29.28,20.39 IC2.14 | 146.23,59.97 147.22,60.96 LED1B.8 | 146.23,59.97 146.15,59.89 146.15,55.93 143.56,53.34 LED1A.3 | LED1A.8 143.56,68.58 146.15,65.99 146.15,60.05 146.23,59.97 | LED3B.8 126.95,60.96 LED2B.3 | LED6B.8 88.85,60.96 LED5B.3 | IC1.21 45.72,43.28 IC1.20 | IC4.16 21.49,50.9 21.03,51.36 21.03,55.78 R5.2 | JOY2/TWI.1 3.81,12.8 3.81,21.49 JOY1.1 3.81,21.64 POT2.1 | C11.1 3.81,54.56 3.81,48.31 5V.1 3.81,48.16 3.81,39.47 POT1.1 | 16.61,10.21 16.61,11.43 | 16.61,10.21 16.61,8.99 R4.2 | 16.61,11.43 R3.2 16.61,11.43 | R1.2 16.61,16.46 16.61,14.02 R2.2 16.61,13.87 16.61,11.43 | 16.61,10.21 29.11,10.21 29.21,10.21 | LATCH1.15 147.22,22.86 146.15,23.93 146.15,24.08 146.07,24.16 | LATCH2.15 134.57,22.86 133.5,23.93 133.5,24.08 133.4,24.18 | LATCH3.15 120.7,24.08 120.65,24.13 | LATCH4.15 109.12,22.86 108.05,23.93 108.05,24.08 107.97,24.16
  Top 0.305: LATCH5.15 96.47,22.86 95.4,23.93 95.4,24.08 95.3,24.18 | LATCH6.15 82.6,24.08 82.55,24.13 | LATCH7.15 71.02,22.86 69.95,23.93 69.95,24.08 69.88,24.16 | LATCH8.15 58.37,22.86 57.3,23.93 57.3,24.08 57.2,24.18 | 41.91,12.8 38.1,12.8 IC3.6 38.1,12.65 36.42,10.97 36.42,10.36 29.26,10.36 29.21,10.36 | 41.91,9.14 54.56,9.14 54.61,9.14
  Bottom 0.305: 118.11,60.96 LED3A.3 | 118.11,60.96 LED3B.3 109.27,60.96 LED4B.8 109.12,60.96 105.46,60.96 | 118.11,60.96 LED3A.8 | 118.11,60.96 LED3B.8 | 130.91,60.96 130.91,53.34 LED2A.3 | 130.91,60.96 134.57,60.96 LED2B.8 134.72,60.96 139.6,60.96 LED1B.3 139.75,60.96 147.22,60.96 LED1B.8 | 130.91,60.96 130.91,68.58 LED2A.8 | 130.91,60.96 127.1,60.96 LED2B.3 | 54.71,60.96 54.71,53.34 LED8A.3 | 54.71,60.96 58.37,60.96 LED8B.8 58.52,60.96 63.4,60.96 LED7B.3 63.55,60.96 67.36,60.96 | 54.71,66.9 54.71,60.96 | 54.71,66.9 54.71,68.58 LED8A.8 | 54.71,60.96 50.9,60.96 LED8B.3 | 67.36,60.96 67.36,53.34 LED7A.3 | 67.36,60.96 71.02,60.96 LED7B.8 71.17,60.96 LED6B.3 80.01,60.96 | 67.36,60.96 67.36,68.58 LED7A.8 | 105.46,60.96 105.46,53.34 LED4A.3 | 105.46,60.96 105.46,68.58 LED4A.8 | 105.46,60.96 101.65,60.96 LED4B.3 101.5,60.96 96.62,60.96 LED5B.8 96.47,60.96 92.81,60.96 | 80.01,60.96 LED6A.3 | 80.01,60.96 LED6A.8 | 80.01,60.96 LED6B.8 | 92.81,60.96 92.81,53.34 LED5A.3 | 92.81,60.96 92.81,68.58 LED5A.8 | 92.81,60.96 89,60.96 LED5B.3 | 46.86,49.15 47.4,48.62 47.4,45.72 IC1.21 | 46.86,49.15 46.79,49.23 39.01,49.23 38.1,48.31 IC1.7 | 29.03,51.89 28.04,50.9 21.64,50.9 IC4.16 21.49,50.9 18.9,53.49 4.88,53.49 3.81,54.56 C11.1 | 29.03,51.89 PROG.2 | 47.4,51.82 47.4,50.44 46.94,49.99 46.94,49.23 46.86,49.15 | 47.4,51.82 29.11,51.82 29.03,51.89 | IC4.6 13.87,38.1 13.26,37.49 5.64,37.49 3.81,39.32 POT1.1 3.81,39.17 POT2.1 | 70.03,21.87 69.95,21.79 59.59,21.79 58.52,22.86 LATCH8.15 | 70.03,21.87 71.02,22.86 LATCH7.15 | 82.83,21.87 82.75,21.79 70.1,21.79 70.03,21.87 | 82.83,21.87 LATCH6.15 | 95.48,21.87 95.4,21.79 82.91,21.79 82.83,21.87
  Bottom 0.305: 95.48,21.87 96.47,22.86 LATCH5.15 | 108.13,21.87 108.05,21.79 95.56,21.79 95.48,21.87 | 108.13,21.87 109.12,22.86 LATCH4.15 | 120.93,21.87 120.85,21.79 108.2,21.79 108.13,21.87 | 120.93,21.87 LATCH3.15 | LATCH2.15 134.57,22.86 133.5,21.79 121.01,21.79 120.93,21.87 | LATCH1.16 147.22,25.45 146.3,26.36 135.64,26.36 134.72,25.45 LATCH2.16 | JOY2/TWI.1 3.81,12.65 7.47,8.99 16.46,8.99 R4.2 | 54.71,66.9 51.51,66.9 51.21,67.21 50.29,67.21 48.46,65.38 48.46,51.82 47.4,51.82

## Text on the board
tNames: 1 | 2 | RESET | 1 | 2 | GND | Modular Display Board v1.2 | Jeremy Elson Sep 2009